# Altium PCB board.PcbDoc (part 2 of 3)
Units mil, origin at the board's own origin, x right, y up, seen from the top; angles counter-clockwise.
Board outline 6000 x 4000 mil, 2 copper layers (Top Layer, Bottom Layer); 112 components, 157 nets, 575 pads, 180 vias.
Unrouted connection lines stored in the file: 1.
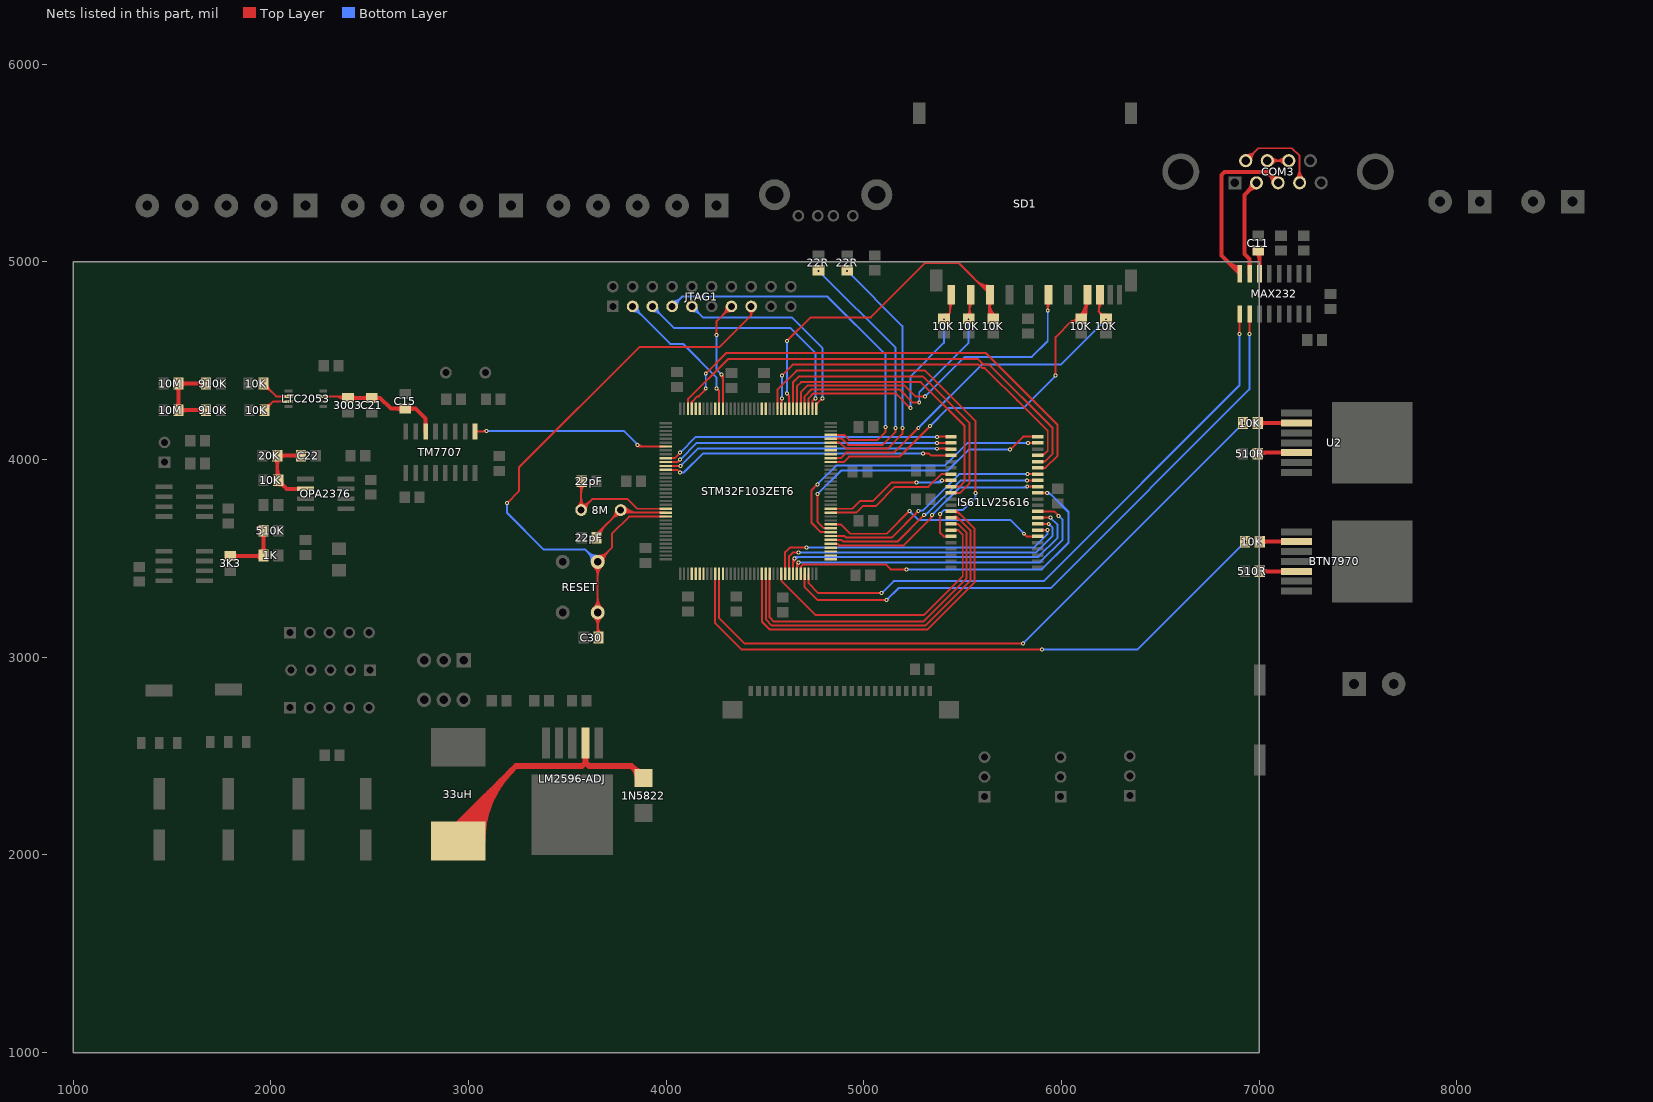
[diagram p2: the nets of this part, all layers, seen from the top]

## Via types
v1: diameter 20, hole 10, Top Layer to Bottom Layer, 173 vias
v2: diameter 196.85, hole 118.11, Top Layer to Bottom Layer, 7 vias

## Nets (pads, with @x,y where several pads share a name; then routed paths per layer and width w, separated by ;. In a path a pad name is that pad's centre, name@x,y a point inside that pad or via, vN(x,y) a via of type N, cw(c..) or ccw(c..) an arc to the next point about the centre after c; other vN are vias at no path point) (continued)
NetC11_2: C11.2 MAX232.6 | length 176.8
  Top Layer w20: C11.2@6987.91,5046.57 cw(c6958.73,5017.39) 7000,5017.39 ; 7000,5022.53 cw(c7034.01,5022.53) C11.2@7009.96,5046.57 ; C11.2@7000,5057.6 7000,4941.36 MAX232.6@7001,4940.36
NetC22_2: 10K.1@2037.4,3895 20K.2 C22.2 OPA2376.2 | length 697.9
  Top Layer w20: 20K.2@2021.38,4005.04 cw(c1994.76,3978.42) 2032.4,3978.42 cw(c2070.04,3978.42) 20K.2@2043.43,4005.04 ; 10K.1@2026.38,3909.96 ccw(c2011.83,3924.5) 10K.1@2032.4,3924.5 ; 2032.4,3948.65 ccw(c2087.11,3948.65) 10K.1@2048.43,3909.96 ; 10K.1@2037.4,3875.47 cw(c2037.4,3828.33) 2070.74,3861.66 ; 20K.2@2043.43,4008.98 cw(c2070.04,3982.36) 2070.04,4020 cw(c2070.04,4057.64) 20K.2@2043.43,4031.02 ; 10K.1@2052.99,3891.06 ccw(c2081.13,3891.06) 10K.1@2061.23,3871.17 ; C22.2@2141.57,4008.98 ccw(c2114.96,3982.36) 2114.96,4020 ccw(c2114.96,4057.64) C22.2@2141.57,4031.02 ; C22.2@2152.6,4020 20K.2@2032.4,4020 2032.4,3900 10K.1@2037.4,3895 2080.4,3852 OPA2376.2@2174.64,3852
NetD1_2: 1N5822.2 33uH.1 LM2596-ADJ.2 | length 2939.4
  Top Layer w30: 33uH.1@2920.3,2070 cw(c3065.86,2070) 2962.93,2172.93 ; 33uH.1@2947.5,2070 2947.5,2157.5 3240,2450 3573.86,2450 3591.93,2468.07 ; 33uH.1@2950.3,2070 cw(c3168.29,2070) 3014.14,2224.14 ; 33uH.1@2980.3,2070 cw(c3270.71,2070) 3065.36,2275.36 ; 33uH.1@3010.3,2070 cw(c3373.14,2070) 3116.57,2326.57 ; 33uH.1@3040.3,2070 cw(c3475.57,2070) 3167.78,2377.78 ; 33uH.1@3070.3,2070 cw(c3577.99,2070) 3219,2429 ; LM2596-ADJ.2@3591.93,2566.85 3591.93,2468.07 ; 1N5822.2@3854.72,2388.58 ccw(c3781.63,2388.58) 3833.32,2440.27 ccw(c3885,2491.95) 1N5822.2@3885,2418.86 ; 1N5822.2@3885,2388.58 3823.58,2450 3610,2450 3591.93,2468.07
NetJ1_2: COM3.2 MAX232.7 | length 584
  Top Layer w20: MAX232.7@6951,4940.36 6951,5014 6925,5040 6925,5339.13 COM3.2@6985.94,5400.08 ; COM3.2@6962.68,5400.08 cw(c6906.5,5400.08) 6946.22,5360.36 cw(c6985.94,5320.64) COM3.2@6985.94,5376.81
NetJ1_3: COM3.3 MAX232.8 | length 1027.9
  Top Layer w20: 6844.14,4997.22 ccw(c6901,5054.08) MAX232.8@6901,4973.67 ; 6878.28,4963.08 ccw(c6901,4985.79) MAX232.8@6901,4953.67 ; MAX232.8@6901,4940.36 6810,5031.36 6810,5440 6825,5455 7040.08,5455 COM3.3@7095,5400.08 ; COM3.3@7071.73,5400.08 ccw(c7015.56,5400.08) 7055.28,5439.8 ccw(c7095,5479.52) COM3.3@7095,5423.35
NetJ1_4: COM3.4 COM3.6 | length 803.8
  Top Layer w10: COM3.6@6931.42,5511.89 6994.53,5575 7165,5575 7204.05,5535.95 COM3.4@7204.05,5400.08 ; COM3.6@6931.42,5530.16 ccw(c6931.42,5574.26) 6962.6,5543.07 ccw(c6993.79,5511.89) COM3.6@6949.69,5511.89 ; COM3.6@6931.42,5540.16 ccw(c6931.42,5608.4) 6979.67,5560.15 ccw(c7027.93,5511.89) COM3.6@6959.69,5511.89 ; COM3.4@7184.07,5420.07 ccw(c7135.81,5468.32) 7204.05,5468.32 ccw(c7272.3,5468.32) COM3.4@7224.04,5420.07 ; COM3.4@7191.14,5413 ccw(c7159.95,5444.18) 7204.05,5444.18 ccw(c7248.16,5444.18) COM3.4@7216.97,5413
NetJ1_7: COM3.7 COM3.8 | length 462
  Top Layer w10: COM3.7@7040.47,5511.89 COM3.8@7149.53,5511.89 ; COM3.7@7053.39,5498.97 cw(c7084.57,5467.79) 7084.57,5511.89 cw(c7084.57,5555.99) COM3.7@7053.39,5524.81 ; COM3.7@7060.46,5491.9 cw(c7108.72,5443.65) 7108.72,5511.89 cw(c7108.72,5580.13) COM3.7@7060.46,5531.88 ; COM3.8@7129.54,5491.9 ccw(c7081.28,5443.65) 7081.28,5511.89 ccw(c7081.28,5580.13) COM3.8@7129.54,5531.88 ; COM3.8@7136.61,5498.97 ccw(c7105.43,5467.79) 7105.43,5511.89 ccw(c7105.43,5555.99) COM3.8@7136.61,5524.81
NetQ2_2: 10K.2@1962.4,4385 LTC2053.2 | length 259
  Top Layer w10: 10K.2@1962.4,4360.47 cw(c1962.4,4301.26) 2004.27,4343.13 ; 10K.2@1962.4,4370.47 cw(c1962.4,4335.4) 10K.2@1987.2,4360.2 ; 10K.2@1962.4,4385 2027,4320.4 LTC2053.2@2089,4320.4 ; 10K.2@1982.99,4381.06 ccw(c2023.2,4381.06) 1994.77,4352.63
NetQ2_3: 10K.2@1967.4,4250 LTC2053.3 | length 245.8
  Top Layer w10: 10K.2@1967.4,4250 2012.2,4294.8 LTC2053.3@2089,4294.8 ; 10K.2@1967.4,4264.53 ccw(c1967.4,4299.6) 10K.2@1992.2,4274.8 ; 10K.2@1967.4,4274.53 ccw(c1967.4,4333.74) 2009.27,4291.87 ; 10K.2@1987.99,4253.94 cw(c2028.2,4253.94) 1999.77,4282.37
NetR3_2: 10K.2@7002.4,3585 BTN7970.2 | length 274.4
  Top Layer w20: 10K.2@7002.4,3585 BTN7970.2@7188.46,3585 ; 10K.2@7013.43,3573.98 cw(c7040.04,3547.36) 7040.04,3585 cw(c7040.04,3622.64) 10K.2@7013.43,3596.02 ; BTN7970.2@7121.98,3579.54 ccw(c7108.81,3566.37) 7108.81,3585 ccw(c7108.81,3603.63) BTN7970.2@7121.98,3590.46
NetR4_2: 10K.2@6992.4,4185 U2.2 | length 284.4
  Top Layer w20: 10K.2@6992.4,4185 U2.2@7188.46,4185 ; 10K.2@7003.43,4173.98 cw(c7030.04,4147.36) 7030.04,4185 cw(c7030.04,4222.64) 10K.2@7003.43,4196.02 ; U2.2@7121.98,4179.54 ccw(c7108.81,4166.37) 7108.81,4185 ccw(c7108.81,4203.63) U2.2@7121.98,4190.46
NetR5_2: 510R.2@7002.4,3435 BTN7970.5 | length 274.4
  Top Layer w20: 510R.2@7002.4,3435 BTN7970.5@7188.46,3435 ; 510R.2@7013.43,3423.98 cw(c7040.04,3397.36) 7040.04,3435 cw(c7040.04,3472.64) 510R.2@7013.43,3446.02 ; BTN7970.5@7121.98,3429.54 ccw(c7108.81,3416.37) 7108.81,3435 ccw(c7108.81,3453.63) BTN7970.5@7121.98,3440.46
NetR6_2: 510R.2@6992.4,4030 U2.5 | length 279.4
  Top Layer w20: 510R.2@6997.4,4035 U2.5@7188.46,4035 ; 510R.2@7003.43,4022.91 cw(c7032.61,3993.73) 7032.61,4035 ; 510R.2@7003.43,4044.96 ccw(c7027.47,4069.01) 7027.47,4035 ; U2.5@7121.98,4029.54 ccw(c7108.81,4016.37) 7108.81,4035 ccw(c7108.81,4053.63) U2.5@7121.98,4040.46
NetR13_1: 10M.1@1532.4,4385 10M.2@1532.4,4250 910K.2 | length 770.1
  Top Layer w20: 10M.2@1521.38,4264.96 ccw(c1494.76,4291.58) 1532.4,4291.58 ccw(c1570.04,4291.58) 10M.2@1543.43,4264.96 ; 10M.1@1521.38,4370.04 cw(c1494.76,4343.42) 1532.4,4343.42 cw(c1570.04,4343.42) 10M.1@1543.43,4370.04 ; 10M.2@1543.43,4238.98 cw(c1570.04,4212.36) 1570.04,4250 cw(c1570.04,4287.64) 10M.2@1543.43,4261.02 ; 10M.1@1543.43,4373.98 cw(c1570.04,4347.36) 1570.04,4385 cw(c1570.04,4422.64) 10M.1@1543.43,4396.02 ; 910K.2@1661.57,4238.98 ccw(c1634.96,4212.36) 1634.96,4250 ccw(c1634.96,4287.64) 910K.2@1661.57,4261.02 ; 910K.2@1661.57,4373.98 ccw(c1634.96,4347.36) 1634.96,4385 ccw(c1634.96,4422.64) 910K.2@1661.57,4396.02 ; 910K.2@1672.6,4250 10M.2@1532.4,4250 10M.1@1532.4,4385 910K.2@1672.6,4385
NetR24_2: 1K.2@1962.6,3515 3K3.2 510K.1@1962.6,3640 | length 530.2
  Top Layer w20: 3K3.2@1795,3512.4 1960,3512.4 1K.2@1962.6,3515 510K.1@1962.6,3640 ; 3K3.2@1809.96,3501.38 cw(c1836.58,3474.76) 1836.58,3512.4 cw(c1836.58,3550.04) 3K3.2@1809.96,3523.43 ; 1921.73,3512.4 cw(c1921.73,3470.19) 1K.2@1951.57,3500.04 ; 1928.19,3512.4 ccw(c1928.19,3545.47) 1K.2@1951.57,3522.09 ; 1K.2@1951.57,3529.96 ccw(c1924.96,3556.58) 1962.6,3556.58 ccw(c2000.24,3556.58) 1K.2@1973.62,3529.96 ; 510K.1@1951.57,3625.04 cw(c1924.96,3598.42) 1962.6,3598.42 cw(c2000.24,3598.42) 510K.1@1973.62,3625.04
NRST: C30.2 JTAG1.8 RESET.2 STM32F103ZET6.25 | length 4365.6
  Top Layer w10: v1(3195,3780) 3255,3840 3255,3960 3865,4570 4270,4570 4430,4730 ; v1@3195,3785 ccw(c3195,3797.07) 3203.54,3788.54 ccw(c3212.07,3780) v1@3200,3780 ; RESET.2@3632.06,3205.53 cw(c3580.11,3153.58) 3653.58,3153.58 cw(c3727.05,3153.58) RESET.2@3675.1,3205.53 ; RESET.2@3632.06,3248.57 ccw(c3580.11,3300.52) 3653.58,3300.52 ccw(c3727.05,3300.52) RESET.2@3675.1,3248.57 ; RESET.2@3632.06,3461.43 cw(c3580.11,3409.48) 3653.58,3409.48 cw(c3727.05,3409.48) RESET.2@3675.1,3461.43 ; RESET.2@3639.13,3212.6 cw(c3604.25,3177.72) 3653.58,3177.72 cw(c3702.91,3177.72) RESET.2@3668.03,3212.6 ; RESET.2@3639.13,3241.5 ccw(c3604.25,3276.38) 3653.58,3276.38 ccw(c3702.91,3276.38) RESET.2@3668.03,3241.5 ; RESET.2@3639.13,3468.5 cw(c3604.25,3433.62) 3653.58,3433.62 cw(c3702.91,3433.62) RESET.2@3668.03,3468.5 ; C30.2@3642.84,3118.5 ccw(c3616.91,3144.42) 3653.58,3144.42 ; C30.2@3653.58,3121.18 RESET.2@3653.58,3482.95 3725,3554.37 3725,3625 3812.05,3712.05 STM32F103ZET6.25@3997.68,3712.05 ; 3653.58,3138.73 ccw(c3692.19,3138.73) C30.2@3664.89,3111.43 ; 3653.58,3162.87 ccw(c3716.33,3162.87) C30.2@3671.96,3118.5 ; RESET.2@3653.58,3503.38 ccw(c3653.58,3552.71) 3688.46,3517.83 ccw(c3723.34,3482.95) RESET.2@3674.01,3482.95 ; RESET.2@3653.58,3513.39 ccw(c3653.58,3586.86) 3705.53,3534.9 ccw(c3757.49,3482.95) RESET.2@3684.02,3482.95 ; JTAG1.8@4416.71,4754.39 cw(c4400.99,4730) 4430,4730 ; JTAG1.8@4430,4775 4430,4730 ; JTAG1.8@4443.29,4754.39 ccw(c4459.01,4730) 4430,4730
  Bottom Layer w10: v1@3191.46,3776.46 cw(c3182.93,3767.93) 3195,3767.93 cw(c3207.07,3767.93) v1@3198.54,3776.46 ; v1(3195,3780) 3195,3730 3380,3545 3591.53,3545 RESET.2@3653.58,3482.95 ; RESET.2@3623.15,3482.95 ccw(c3549.68,3482.95) 3601.63,3534.9 ccw(c3653.58,3586.86) RESET.2@3653.58,3513.39 ; RESET.2@3633.15,3482.95 ccw(c3583.82,3482.95) 3618.7,3517.83 ccw(c3653.58,3552.71) RESET.2@3653.58,3503.38
OSC_1: 8M.2 22pF.2@3572.6,3890 STM32F103ZET6.23 | length 1021.5
  Top Layer w10: 8M.2@3552.32,3762.68 ccw(c3509.64,3805.36) 3570,3805.36 ccw(c3630.36,3805.36) 8M.2@3587.68,3762.68 ; 22pF.2@3558.04,3871.5 cw(c3529.16,3842.63) 3570,3842.63 ; 8M.2@3559.39,3755.61 ccw(c3533.79,3781.21) 3570,3781.21 ccw(c3606.21,3781.21) 8M.2@3580.61,3755.61 ; 8M.2@3570,3760 ccw(c3570,3796.21) 3595.61,3770.61 ccw(c3621.21,3745) 8M.2@3585,3745 ; 8M.2@3570,3770 ccw(c3570,3830.36) 3612.68,3787.68 ccw(c3655.36,3745) 8M.2@3595,3745 ; 3570,3830.08 cw(c3628.58,3830.08) 22pF.2@3587.16,3871.5 ; 3570,3854.22 cw(c3604.44,3854.22) 22pF.2@3580.09,3878.57 ; 22pF.2@3570,3887.4 8M.2@3570,3745 3625,3800 3805,3800 3853.58,3751.42 STM32F103ZET6.23@3997.68,3751.42
OSC_2: 8M.1 22pF.2@3647.4,3605 STM32F103ZET6.24 | length 912.5
  Top Layer w10: 22pF.2@3647.4,3622.4 8M.1@3770,3745 3783.27,3731.73 STM32F103ZET6.24@3997.68,3731.73 ; 22pF.2@3647.4,3629.53 ccw(c3647.4,3646.73) 3659.57,3634.57 ; 22pF.2@3647.99,3608.94 cw(c3681.93,3608.94) 22pF.2@3657.93,3632.93 ; 22pF.2@3657.99,3608.94 cw(c3716.07,3608.94) 3675,3650 ; 22pF.2@3667.99,3608.94 cw(c3750.21,3608.94) 3692.07,3667.07 ; 8M.1@3745,3745 cw(c3684.64,3745) 3727.32,3702.32 cw(c3770,3659.64) 8M.1@3770,3720 ; 8M.1@3755,3745 cw(c3718.79,3745) 3744.39,3719.39 cw(c3770,3693.79) 8M.1@3770,3730 ; 8M.1@3773.54,3748.54 ccw(c3814.1,3789.1) 3814.1,3731.73 ; 8M.1@3780.61,3755.61 ccw(c3838.24,3813.24) 3838.24,3731.73 ; 8M.1@3787.68,3727.32 cw(c3798.32,3716.68) 3798.32,3731.73 ; 8M.1@3787.68,3762.68 ccw(c3862.39,3837.39) 3862.39,3731.73
OUT1: 3003.2 C15.1 C21.1 LTC2053.7 TM7707.6 | length 1043.9
  Top Layer w10: LTC2053.7@2265,4320.4 2382,4320.4 3003.2@2390,4312.4 ; 2317.04,4320.4 cw(c2317.04,4243.38) 3003.2@2371.5,4297.84 ; 2341.19,4320.4 cw(c2341.19,4267.53) 3003.2@2378.57,4304.91 ; 2355.66,4320.4 ccw(c2355.66,4342.8) 3003.2@2371.5,4326.96
  Top Layer w20: 3003.2@2390,4312.4 C21.1@2510,4312.4 2552.6,4312.4 2607.4,4257.6 C15.1@2680,4257.6 2732.4,4257.6 2783,4207 TM7707.6@2783,4143.32 ; 3003.2@2404.96,4301.38 cw(c2431.58,4274.76) 2431.58,4312.4 cw(c2431.58,4350.04) 3003.2@2404.96,4323.43 ; C21.1@2495.04,4301.38 ccw(c2468.42,4274.76) 2468.42,4312.4 ccw(c2468.42,4350.04) C21.1@2495.04,4323.43 ; C21.1@2524.96,4301.38 cw(c2551.58,4274.76) 2551.58,4312.4 cw(c2551.58,4350.04) C21.1@2524.96,4323.43 ; C15.1@2665.04,4246.57 ccw(c2638.42,4219.96) 2638.42,4257.6 ccw(c2638.42,4295.24) C15.1@2665.04,4268.62 ; C15.1@2694.96,4246.57 cw(c2721.58,4219.96) 2721.58,4257.6 cw(c2721.58,4295.24) C15.1@2694.96,4268.62
PA4: STM32F103ZET6.40
PA5: STM32F103ZET6.41
PA6: STM32F103ZET6.42
PA7: STM32F103ZET6.43
PA8: STM32F103ZET6.100
PA9: STM32F103ZET6.101
PA10: STM32F103ZET6.102
PA11: 22R.1@4915,4957.6 STM32F103ZET6.103 | length 1434.5
  Top Layer w10: STM32F103ZET6.103@4832.32,4086.06 4878.94,4086.06 4910,4055 5120,4055 5195,4130 v1(5195,4160) ; v1@5191.46,4156.46 cw(c5182.93,4147.93) 5195,4147.93 cw(c5207.07,4147.93) v1@5198.54,4156.46
  Bottom Layer w10: v1@4915,4950 cw(c4915,4937.93) 4923.54,4946.46 cw(c4932.07,4955) v1@4920,4955 ; v1(4915,4955) 5195,4675 5195,4550 ; v1@5191.46,4163.54 ccw(c5182.93,4172.07) 5195,4172.07 ccw(c5207.07,4172.07) v1@5198.54,4163.54 ; v1(5195,4160) 5195,4550 ; 5195,4580 5195,4550
PA12: 22R.1@4770,4957.6 STM32F103ZET6.104 | length 1425.8
  Top Layer w10: STM32F103ZET6.104@4832.32,4105.75 4889.25,4105.75 4920,4075 5095,4075 5160,4140 v1(5160,4160) ; v1@5156.46,4156.46 cw(c5147.93,4147.93) 5160,4147.93 cw(c5172.07,4147.93) v1@5163.54,4156.46
  Bottom Layer w10: v1@4770,4950 cw(c4770,4937.93) 4778.54,4946.46 cw(c4787.07,4955) v1@4775,4955 ; v1(4770,4955) 5160,4565 5160,4445 ; v1@5156.46,4163.54 ccw(c5147.93,4172.07) 5160,4172.07 ccw(c5172.07,4172.07) v1@5163.54,4163.54 ; v1(5160,4160) 5160,4445 ; 5160,4470 5160,4445
PA13: JTAG1.4 STM32F103ZET6.105 | length 2113.7
  Top Layer w10: STM32F103ZET6.105@4832.32,4125.43 4899.57,4125.43 4925,4100 5070,4100 5110,4140 v1(5110,4165) ; v1@5106.46,4161.46 cw(c5097.93,4152.93) 5110,4152.93 cw(c5122.07,4152.93) v1@5113.54,4161.46
  Bottom Layer w10: JTAG1.4@4030,4775 4080,4825 4815,4825 5110,4530 5110,4365 ; JTAG1.4@4030,4789.53 ccw(c4030,4824.6) 4054.8,4799.8 ccw(c4079.6,4775) JTAG1.4@4044.53,4775 ; JTAG1.4@4030,4799.53 ccw(c4030,4858.74) 4071.87,4816.87 ccw(c4113.74,4775) JTAG1.4@4054.53,4775 ; v1@5106.46,4168.54 ccw(c5097.93,4177.07) 5110,4177.07 ccw(c5122.07,4177.07) v1@5113.54,4168.54 ; v1(5110,4165) 5110,4365 ; 5110,4375 5110,4365
PA14: JTAG1.5 STM32F103ZET6.109 | length 1261.5
  Top Layer w10: STM32F103ZET6.109@4759.49,4257.32 4759.49,4279.49 v1(4790,4310) ; STM32F103ZET6.109@4759.49,4283.82 ccw(c4759.49,4294.27) 4766.88,4286.88 ; v1@4785,4310 cw(c4772.93,4310) 4781.46,4301.46 cw(c4790,4292.93) v1@4790,4305
  Bottom Layer w10: JTAG1.5@4130,4750.47 cw(c4130,4691.26) 4171.87,4733.13 cw(c4213.74,4775) JTAG1.5@4154.53,4775 ; JTAG1.5@4130,4760.47 cw(c4130,4725.4) 4154.8,4750.2 cw(c4179.6,4775) JTAG1.5@4144.53,4775 ; JTAG1.5@4130,4775 4185,4720 4635,4720 4790,4565 v1(4790,4310) ; v1@4786.46,4313.54 ccw(c4777.93,4322.07) 4790,4322.07 ccw(c4802.07,4322.07) v1@4793.54,4313.54
PA15: JTAG1.3 STM32F103ZET6.110 | length 1397.3
  Top Layer w10: STM32F103ZET6.110@4739.8,4257.32 4739.8,4294.8 v1(4755,4310) ; v1@4750,4310 cw(c4737.93,4310) 4746.46,4301.46 cw(c4755,4292.93) v1@4755,4305
  Bottom Layer w10: JTAG1.3@3930,4750.47 cw(c3930,4691.26) 3971.87,4733.13 cw(c4013.74,4775) JTAG1.3@3954.53,4775 ; JTAG1.3@3930,4760.47 cw(c3930,4725.4) 3954.8,4750.2 cw(c3979.6,4775) JTAG1.3@3944.53,4775 ; JTAG1.3@3930,4775 4040,4665 4630,4665 4755,4540 v1(4755,4310) ; v1@4751.46,4313.54 ccw(c4742.93,4322.07) 4755,4322.07 ccw(c4767.07,4322.07) v1@4758.54,4313.54
PB0: 10K.1@6927.6,3585 STM32F103ZET6.46 | length 3270.1
  Top Layer w10: STM32F103ZET6.46@4247.68,3422.68 4247.68,3172.32 4380,3040 v1(5900,3040) ; v1@5896.46,3036.46 ccw(c5887.93,3027.93) 5887.93,3040 ccw(c5887.93,3052.07) v1@5896.46,3043.54
  Bottom Layer w10: v1(5900,3040) 6385,3040 v1(6930,3585) ; v1@5903.54,3036.46 cw(c5912.07,3027.93) 5912.07,3040 cw(c5912.07,3052.07) v1@5903.54,3043.54 ; v1@6925,3585 cw(c6912.93,3585) 6921.46,3576.46 cw(c6930,3567.93) v1@6930,3580
PB1: 10K.1@6917.6,4185 STM32F103ZET6.47 | length 3446.9
  Top Layer w10: STM32F103ZET6.47@4267.36,3422.68 4267.36,3197.64 4395,3070 v1@5802.6,3070 ; v1@5801.46,3066.46 ccw(c5792.93,3057.93) 5792.93,3070 ccw(c5792.93,3082.07) v1@5801.46,3073.54
  Bottom Layer w10: v1(5805,3070) v1(6920,4185) ; v1@5805,3075 ccw(c5805,3087.07) 5813.54,3078.54 ccw(c5822.07,3070) v1@5810,3070 ; v1@6915,4185 cw(c6902.93,4185) 6911.46,4176.46 cw(c6920,4167.93) v1@6920,4180
PB2: STM32F103ZET6.48
PB3: JTAG1.7 STM32F103ZET6.133 | length 830.7
  Top Layer w10: v1@4251.46,4633.54 ccw(c4242.93,4642.07) 4255,4642.07 ccw(c4267.07,4642.07) v1@4258.54,4633.54 ; v1(4255,4630) 4255,4700 JTAG1.7@4330,4775 4305,4750 ; v1@4276.46,4426.46 cw(c4250.91,4400.91) 4287.05,4400.91 ; v1(4280,4430) 4287.05,4422.95 STM32F103ZET6.133@4287.05,4257.32 ; JTAG1.7@4305.47,4775 cw(c4246.26,4775) 4288.13,4733.13 cw(c4330,4691.26) JTAG1.7@4330,4750.47 ; JTAG1.7@4315.47,4775 cw(c4280.4,4775) 4305.2,4750.2 cw(c4330,4725.4) JTAG1.7@4330,4760.47
  Bottom Layer w10: v1@4251.46,4626.46 cw(c4242.93,4617.93) 4255,4617.93 cw(c4267.07,4617.93) v1@4258.54,4626.46 ; v1(4255,4630) 4255,4455 v1(4280,4430) ; v1@4275,4430 ccw(c4262.93,4430) 4271.46,4438.54 ccw(c4280,4447.07) v1@4280,4435
PB4: JTAG1.2 STM32F103ZET6.134 | length 922.9
  Top Layer w10: v1@4255,4355 cw(c4255,4342.93) 4263.54,4351.46 cw(c4272.07,4360) v1@4260,4360 ; v1(4255,4360) 4267.36,4347.64 STM32F103ZET6.134@4267.36,4257.32
  Bottom Layer w10: JTAG1.2@3830,4750.47 cw(c3830,4691.26) 3871.87,4733.13 cw(c3913.74,4775) JTAG1.2@3854.53,4775 ; JTAG1.2@3830,4760.47 cw(c3830,4725.4) 3854.8,4750.2 cw(c3879.6,4775) JTAG1.2@3844.53,4775 ; JTAG1.2@3830,4775 4020,4585 4085,4585 4255,4415 v1(4255,4360) ; v1@4251.46,4363.54 ccw(c4242.93,4372.07) 4255,4372.07 ccw(c4267.07,4372.07) v1@4258.54,4363.54
PB5: STM32F103ZET6.135
PB8: STM32F103ZET6.139
PB9: STM32F103ZET6.140
PB10: MAX232.10 STM32F103ZET6.69 | length 3266.5
  Top Layer w10: STM32F103ZET6.69@4700.43,3422.68 4700.43,3354.57 4765,3290 v1(5115,3290) ; v1@5111.46,3286.46 ccw(c5102.93,3277.93) 5102.93,3290 ccw(c5102.93,3302.07) v1@5111.46,3293.54 ; MAX232.10@6946.18,4699.33 cw(c6934.56,4687.7) 6951,4687.7 cw(c6967.44,4687.7) MAX232.10@6955.82,4699.33 ; v1@6946.46,4638.54 ccw(c6935.51,4649.49) 6951,4649.49 ; v1@6950,4630 6951,4631 MAX232.10@6951,4735.64
  Bottom Layer w10: v1(5115,3290) 5175,3350 5945,3350 6950,4355 v1(6950,4635) ; v1@5115,3295 ccw(c5115,3307.07) 5123.54,3298.54 ccw(c5132.07,3290) v1@5120,3290 ; v1@6946.46,4631.46 cw(c6937.93,4622.93) 6950,4622.93 cw(c6962.07,4622.93) v1@6953.54,4631.46
PB11: MAX232.9 STM32F103ZET6.70 | length 3144.2
  Top Layer w10: STM32F103ZET6.70@4720.12,3422.68 4720.12,3374.88 4770,3325 v1(5090,3325) ; v1@5086.46,3321.46 ccw(c5077.93,3312.93) 5077.93,3325 ccw(c5077.93,3337.07) v1@5086.46,3328.54 ; MAX232.9@6896.18,4699.33 cw(c6884.56,4687.7) 6901,4687.7 cw(c6917.44,4687.7) MAX232.9@6905.82,4699.33 ; v1@6896.46,4638.54 ccw(c6885.51,4649.49) 6901,4649.49 ; v1@6900,4630 6901,4631 MAX232.9@6901,4735.64
  Bottom Layer w10: v1(5090,3325) 5150,3385 5910,3385 6900,4375 v1(6900,4635) ; v1@5090,3330 ccw(c5090,3342.07) 5098.54,3333.54 ccw(c5107.07,3325) v1@5095,3325 ; v1@6896.46,4631.46 cw(c6887.93,4622.93) 6900,4622.93 cw(c6912.07,4622.93) v1@6903.54,4631.46
PB12: STM32F103ZET6.73
PB13: STM32F103ZET6.74
PB14: STM32F103ZET6.75
PB15: STM32F103ZET6.76
PC8: 10K.1@6100,4712.4 SD1.7 STM32F103ZET6.98 | length 2302.2
  Top Layer w10: STM32F103ZET6.98@4832.32,3987.64 4897.64,3987.64 4925,4015 5180,4015 v1(5335,4170) ; v1@5330,4170 cw(c5317.93,4170) 5326.46,4161.46 cw(c5335,4152.93) v1@5335,4165 ; v1@5966.46,4428.54 ccw(c5957.93,4437.07) 5970,4437.07 ccw(c5982.07,4437.07) v1@5973.54,4428.54 ; v1(5970,4425) 5970,4620 6050,4700 ; 6063.96,4700 ccw(c6063.96,4723.31) 10K.1@6086.04,4715.81 ; 10K.1@6076.57,4719.03 cw(c6050,4728.06) 6050,4700 ; 10K.1@6089.38,4726.96 ccw(c6002.04,4814.3) SD1.7@6125.55,4814.3 ; 10K.1@6096.45,4719.89 ccw(c6026.19,4790.15) SD1.7@6125.55,4790.15 ; 10K.1@6103.52,4712.82 ccw(c6050.33,4766.01) 6125.55,4766.01 ; 10K.1@6110.59,4705.75 ccw(c6074.47,4741.87) 6125.55,4741.87 ; SD1.7@6120.17,4795.09 cw(c6107.17,4782.09) 6125.55,4782.09 cw(c6153.93,4782.09) SD1.7@6133.86,4802.16 ; 6125.55,4757.95 cw(c6178.07,4757.95) SD1.7@6140.94,4795.09 ; SD1.7@6125.55,4830 6125.55,4737.95 6087.6,4700 6050,4700
  Bottom Layer w10: v1(5335,4170) 5425,4260 5805,4260 v1(5970,4425) ; v1@5335,4175 ccw(c5335,4187.07) 5343.54,4178.54 ccw(c5352.07,4170) v1@5340,4170 ; v1@5965,4425 cw(c5952.93,4425) 5961.46,4416.46 cw(c5970,4407.93) v1@5970,4420
PC9: 10K.1@6225,4712.4 SD1.8 STM32F103ZET6.99 | length 2059.1
  Top Layer w10: STM32F103ZET6.99@4832.32,4007.32 4882.32,4007.32 4910,4035 5150,4035 v1(5275,4160) ; v1@5270,4160 cw(c5257.93,4160) 5266.46,4151.46 cw(c5275,4142.93) v1@5275,4155 ; SD1.8@6184.14,4795.09 cw(c6171.15,4782.09) 6189.53,4782.09 cw(c6217.91,4782.09) SD1.8@6197.84,4802.16 ; 6187.56,4749.84 cw(c6155.8,4718.08) 10K.1@6200.55,4714.19 ; 6189.53,4757.95 cw(c6242.05,4757.95) SD1.8@6204.91,4795.09 ; SD1.8@6189.53,4830 6189.53,4747.87 10K.1@6225,4712.4 ; 6192.63,4744.77 ccw(c6221.06,4773.2) 10K.1@6221.06,4732.99 ; 10K.1@6202.74,4734.67 cw(c6183.72,4715.65) 10K.1@6210.51,4713.32 ; 10K.1@6214.77,4722.64 cw(c6202.13,4710) 10K.1@6220,4710
  Bottom Layer w10: v1(5275,4160) 5595,4480 5995,4480 v1(6225,4710) ; v1@5275,4165 ccw(c5275,4177.07) 5283.54,4168.54 ccw(c5292.07,4160) v1@5280,4160 ; v1@6220,4710 cw(c6207.93,4710) 6216.46,4701.46 cw(c6225,4692.93) v1@6225,4705
PC10: 10K.1@5405,4712.4 SD1.9 STM32F103ZET6.111 | length 1468.3
  Top Layer w10: STM32F103ZET6.111@4720.12,4257.32 4720.12,4310.12 4745,4335 5160,4335 v1(5235,4260) ; v1@5230,4260 ccw(c5217.93,4260) 5226.46,4268.54 ccw(c5235,4277.07) v1@5235,4265 ; 10K.1@5405,4712.4 5436.57,4743.98 SD1.9@5436.57,4830 ; 10K.1@5409.33,4732.99 ccw(c5410.03,4770.51) 5436.57,4743.97 ccw(c5456.79,4723.76) 10K.1@5428.97,4717.16 ; 10K.1@5410,4710 cw(c5427.87,4710) 10K.1@5415.23,4722.64 ; SD1.9@5431.19,4795.09 cw(c5418.2,4782.09) 5436.57,4782.09 cw(c5464.96,4782.09) SD1.9@5444.89,4802.16 ; 5436.57,4757.95 cw(c5489.1,4757.95) SD1.9@5451.96,4795.09
  Bottom Layer w10: v1@5231.46,4263.54 ccw(c5222.93,4272.07) 5235,4272.07 ccw(c5247.07,4272.07) v1@5238.54,4263.54 ; v1(5235,4260) 5235,4420 5405,4590 v1(5405,4710) ; v1@5401.46,4706.46 cw(c5392.93,4697.93) 5405,4697.93 cw(c5417.07,4697.93) v1@5408.54,4706.46
PC11: 10K.1@5530,4712.4 SD1.1 STM32F103ZET6.112 | length 1585.9
  Top Layer w10: STM32F103ZET6.112@4700.43,4257.32 4700.43,4320.43 4735,4355 5180,4355 5245,4290 v1(5280,4290) ; v1@5276.46,4286.46 ccw(c5267.93,4277.93) 5267.93,4290 ccw(c5267.93,4302.07) v1@5276.46,4293.54 ; 10K.1@5519.38,4726.96 ccw(c5481.66,4764.68) 5535,4764.68 ; 10K.1@5526.46,4713.54 ccw(c5505.86,4734.14) 10K.1@5535,4734.14 ; 10K.1@5526.45,4719.89 ccw(c5505.8,4740.54) 5535,4740.54 ; SD1.1@5529.62,4795.09 cw(c5516.62,4782.09) 5535,4782.09 cw(c5563.38,4782.09) SD1.1@5543.31,4802.16 ; 10K.1@5530,4712.4 5535,4717.4 SD1.1@5535,4830 ; 5535,4757.95 cw(c5587.52,4757.95) SD1.1@5550.38,4795.09 ; 5535,4759.55 ccw(c5581.08,4759.55) 10K.1@5548.5,4726.96
  Bottom Layer w10: v1@5276.46,4293.54 ccw(c5267.93,4302.07) 5280,4302.07 ccw(c5292.07,4302.07) v1@5283.54,4293.54 ; v1(5280,4290) 5280,4340 5530,4590 v1(5530,4710) ; v1@5526.46,4706.46 cw(c5517.93,4697.93) 5530,4697.93 cw(c5542.07,4697.93) v1@5533.54,4706.46
PC12: SD1.5 STM32F103ZET6.113 | length 1862.2
  Top Layer w10: STM32F103ZET6.113@4680.75,4257.32 4680.75,4340.75 4715,4375 5205,4375 5260,4320 v1(5310,4320) ; v1@5306.46,4316.46 ccw(c5297.93,4307.93) 5297.93,4320 ccw(c5297.93,4332.07) v1@5306.46,4323.54 ; SD1.5@5923.32,4795.09 cw(c5910.32,4782.09) 5928.7,4782.09 cw(c5957.08,4782.09) SD1.5@5937.01,4802.16 ; v1@5928.7,4756.3 SD1.5@5928.7,4830 ; v1@5928.7,4757.95 cw(c5981.23,4757.95) SD1.5@5944.08,4795.09 ; 5928.7,4770.21 ccw(c5945.21,4770.21) v1@5933.54,4758.54
  Bottom Layer w10: v1(5310,4320) 5510,4520 5850,4520 5930,4600 v1(5930,4755) ; v1@5310,4325 ccw(c5310,4337.07) 5318.54,4328.54 ccw(c5327.07,4320) v1@5315,4320 ; v1@5926.46,4751.46 cw(c5917.93,4742.93) 5930,4742.93 cw(c5942.07,4742.93) v1@5933.54,4751.46
PC13: STM32F103ZET6.7 TM7707.1 | length 1124.5
  Top Layer w10: TM7707.1@3033,4143.32 v1@3093.32,4143.32 ; TM7707.1@3037.82,4138.5 cw(c3049.44,4126.87) 3049.44,4143.32 cw(c3049.44,4159.76) TM7707.1@3037.82,4148.13 ; 3073.86,4143.32 ccw(c3073.86,4161.14) v1@3086.46,4148.54 ; v1@3851.46,4071.46 ccw(c3863.74,4083.74) 3863.74,4066.38 ; v1(3855,4075) 3863.62,4066.38 STM32F103ZET6.7@3997.68,4066.38 ; v1@3858.54,4078.54 ccw(c3887.89,4107.89) 3887.89,4066.38
  Bottom Layer w10: v1(3090,4145) 3785,4145 v1(3855,4075) ; v1@3093.54,4141.46 cw(c3102.07,4132.93) 3102.07,4145 cw(c3102.07,4157.07) v1@3093.54,4148.54 ; v1@3850,4075 ccw(c3837.93,4075) 3846.46,4083.54 ccw(c3855,4092.07) v1@3855,4080
PD0: IS61LV25616.9 STM32F103ZET6.114 | length 1438.3
  Top Layer w10: STM32F103ZET6.114@4661.06,4257.32 4661.06,4371.06 4682,4392 5288,4392 5510,4170 5510,3890 5483.74,3863.74 IS61LV25616.9@5440.51,3863.74 ; IS61LV25616.9@5462.93,3861.01 cw(c5469.51,3854.43) 5469.51,3863.74 cw(c5469.51,3873.05) IS61LV25616.9@5462.93,3866.47
PD1: IS61LV25616.10 STM32F103ZET6.115 | length 1570.8
  Top Layer w10: STM32F103ZET6.115@4641.38,4257.32 4641.38,4391.38 4670,4420 5300,4420 5535,4185 5535,3880 5487.24,3832.24 IS61LV25616.10@5440.51,3832.24 ; IS61LV25616.10@5462.93,3829.52 cw(c5469.51,3822.93) 5469.51,3832.24 cw(c5469.51,3841.56) IS61LV25616.10@5462.93,3834.97
PD2: 10K.1@5655,4712.4 SD1.2 STM32F103ZET6.116 | length 2386.3
  Top Layer w10: v1@4610,4330 cw(c4610,4317.93) 4618.54,4326.46 cw(c4627.07,4335) v1@4615,4335 ; v1(4610,4335) 4621.69,4323.31 STM32F103ZET6.116@4621.69,4257.32 ; v1(4610,4600) 4730,4720 5035,4720 5310,4995 5478.43,4995 SD1.2@5638.43,4835 ; v1@4610,4605 ccw(c4610,4617.07) 4618.54,4608.54 ccw(c4627.07,4600) v1@4615,4600 ; 5562.95,4910.48 ccw(c5638.43,4985.95) SD1.2@5638.43,4879.21 ; 5580.02,4893.4 ccw(c5638.43,4951.81) SD1.2@5638.43,4869.21 ; 5597.09,4876.33 ccw(c5638.43,4917.67) SD1.2@5638.43,4859.21 ; 5614.16,4859.26 ccw(c5638.43,4883.52) SD1.2@5638.43,4849.21 ; SD1.2@5628.04,4795.09 cw(c5615.04,4782.09) 5633.43,4782.09 cw(c5661.8,4782.09) SD1.2@5641.74,4802.16 ; SD1.2@5628.43,4830 5633.43,4830 5633.43,4733.98 10K.1@5655,4712.4 ; SD1.2@5631.23,4842.19 ccw(c5638.43,4849.38) SD1.2@5638.43,4839.21 ; 10K.1@5633.43,4732.26 ccw(c5670.93,4732.26) 10K.1@5644.41,4705.75 ; 5633.43,4756.41 ccw(c5695.07,4756.41) 10K.1@5651.48,4712.82 ; 5633.43,4757.95 cw(c5685.95,4757.95) SD1.2@5648.81,4795.09 ; 5633.43,4780.55 ccw(c5719.21,4780.55) 10K.1@5658.55,4719.89 ; SD1.2@5633.43,4804.69 ccw(c5743.35,4804.69) 10K.1@5665.62,4726.96
  Bottom Layer w10: v1@4606.46,4596.46 cw(c4597.93,4587.93) 4610,4587.93 cw(c4622.07,4587.93) v1@4613.54,4596.46 ; 4610,4350 v1(4610,4335) v1(4610,4600) ; 4610,4347.07 ccw(c4622.07,4347.07) 4613.54,4338.54 cw(c4622.07,4347.07) 4610,4347.07 ; 4610,4347.07 cw(c4597.93,4347.07) 4606.46,4338.54 ccw(c4597.93,4347.07) 4610,4347.07
PD3: STM32F103ZET6.117
PD4: IS61LV25616.41 STM32F103ZET6.118 | length 2054.2
  Top Layer w10: STM32F103ZET6.118@4582.32,4257.32 4582.32,4307.32 v1(4585,4310) ; 4582.32,4291.46 cw(c4603.54,4291.46) v1@4588.54,4306.46 ; v1(4585,4425) 4640,4480 4720,4480 ; v1@4585,4430 ccw(c4585,4442.07) 4593.54,4433.54 ccw(c4602.07,4425) v1@4590,4425 ; 4705,4480 4720,4480 ; 5775,4300 5800,4275 ; IS61LV25616.41@5879.49,4021.22 5906.22,4021.22 5930,4045 5930,4145 5800,4275 ; IS61LV25616.41@5899.17,4025.08 ccw(c5899.17,4051.41) 5917.79,4032.79 ; 4720,4480 5580.96,4480 5597.96,4463 5612,4463 5800,4275
  Bottom Layer w10: v1@4581.46,4421.46 cw(c4572.93,4412.93) 4585,4412.93 cw(c4597.07,4412.93) v1@4588.54,4421.46 ; 4585,4365 v1(4585,4310) v1(4585,4425) ; 4585,4322.07 ccw(c4597.07,4322.07) 4588.54,4313.54 cw(c4597.07,4322.07) 4585,4322.07 ; 4585,4322.07 cw(c4572.93,4322.07) 4581.46,4313.54 ccw(c4572.93,4322.07) 4585,4322.07
PD5: IS61LV25616.17 STM32F103ZET6.119 | length 2112.5
  Top Layer w10: STM32F103ZET6.119@4562.64,4257.32 4562.64,4352.64 4660,4450 4705,4450 ; 4699.04,4450 4705,4450 ; v1@5381.46,3721.46 cw(c5372.93,3712.93) 5385,3712.93 cw(c5397.07,3712.93) v1@5388.54,3721.46 ; v1(5385,3725) 5385,3630 5403.23,3611.77 IS61LV25616.17@5440.51,3611.77 ; IS61LV25616.17@5418.1,3609.04 ccw(c5411.51,3602.46) 5411.51,3611.77 ccw(c5411.51,3621.09) IS61LV25616.17@5418.1,3614.5 ; v1@5561.46,3833.54 ccw(c5552.93,3842.07) 5565,3842.07 ccw(c5577.07,3842.07) v1@5568.54,3833.54 ; v1(5565,3830) 5565,4195 5310,4450 4705,4450
  Bottom Layer w10: v1(5385,3725) 5405,3745 5500,3745 5525,3770 ; v1@5385,3730 ccw(c5385,3742.07) 5393.54,3733.54 ccw(c5402.07,3725) v1@5390,3725 ; 5535,3780 5525,3770 ; v1@5561.46,3826.46 cw(c5552.93,3817.93) 5565,3817.93 cw(c5577.07,3817.93) v1@5568.54,3826.46 ; v1(5565,3830) 5565,3810 5525,3770
PD6: STM32F103ZET6.122
PD7: STM32F103ZET6.123
PD8: IS61LV25616.36 STM32F103ZET6.77 | length 1308.5
  Top Layer w10: STM32F103ZET6.77@4832.32,3574.25 4867.01,3574.25 4876.26,3565 5200,3565 5345,3710 v1(5345,3720) ; STM32F103ZET6.77@4858.14,3573.37 cw(c4861.63,3559.78) 4871.56,3569.7 ; 5329.39,3694.39 ccw(c5303.79,3720) v1@5340,3720 ; v1(5826.26,3863.74) IS61LV25616.36@5879.49,3863.74 ; v1@5829.8,3860.2 cw(c5838.33,3851.67) 5838.33,3863.74 cw(c5838.33,3875.81) v1@5829.8,3867.28 ; IS61LV25616.36@5857.07,3861.01 ccw(c5850.49,3854.43) 5850.49,3863.74 ccw(c5850.49,3873.05) IS61LV25616.36@5857.07,3866.47
  Bottom Layer w10: v1(5345,3720) 5475.89,3850.89 ; v1@5345,3725 ccw(c5345,3737.07) 5353.54,3728.54 ccw(c5362.07,3720) v1@5350,3720 ; 5805.16,3860 ccw(c5805.16,3884.84) v1@5822.72,3867.28 ; v1(5826.26,3863.74) 5822.52,3860 5485,3860 ; 5475.89,3850.89 5485,3860 ; 5475.89,3850.89 5485,3860
PD9: IS61LV25616.37 STM32F103ZET6.78 | length 1277.2
  Top Layer w10: STM32F103ZET6.78@4832.32,3593.94 4886.06,3593.94 4895,3585 5170,3585 v1(5305,3720) ; v1@5300,3720 cw(c5287.93,3720) 5296.46,3711.46 cw(c5305,3702.93) v1@5305,3715 ; v1(5825.24,3895.24) IS61LV25616.37@5879.49,3895.24 ; v1@5828.77,3891.7 cw(c5837.31,3883.16) 5837.31,3895.24 cw(c5837.31,3907.31) v1@5828.77,3898.77 ; IS61LV25616.37@5857.07,3892.51 ccw(c5850.49,3885.92) 5850.49,3895.24 ccw(c5850.49,3904.55) IS61LV25616.37@5857.07,3897.96
  Bottom Layer w10: v1(5305,3720) 5313.89,3720 5489.12,3895.24 v1(5825.24,3895.24) ; v1@5305,3725 ccw(c5305,3758.53) 5328.71,3734.82 ; v1@5821.7,3891.7 ccw(c5813.16,3883.16) 5813.16,3895.24 ccw(c5813.16,3907.31) v1@5821.7,3898.77
PD10: IS61LV25616.38 STM32F103ZET6.79 | length 1270.4
  Top Layer w10: STM32F103ZET6.79@4832.32,3613.62 4901.38,3613.62 4910,3605 5140,3605 v1(5275,3740) ; v1@5270,3740 cw(c5257.93,3740) 5266.46,3731.46 cw(c5275,3722.93) v1@5275,3735 ; v1(5826.73,3926.73) IS61LV25616.38@5879.49,3926.73 ; v1@5830.27,3923.2 cw(c5838.8,3914.66) 5838.8,3926.73 cw(c5838.8,3938.8) v1@5830.27,3930.27 ; IS61LV25616.38@5857.07,3924 ccw(c5850.49,3917.42) 5850.49,3926.73 ccw(c5850.49,3936.05) IS61LV25616.38@5857.07,3929.46
  Bottom Layer w10: v1(5275,3740) 5277,3742 5297,3742 5481.73,3926.73 v1(5826.73,3926.73) ; v1@5278.54,3736.46 cw(c5291.9,3723.1) 5291.9,3742 ; v1@5823.2,3923.2 ccw(c5814.66,3914.66) 5814.66,3926.73 ccw(c5814.66,3938.8) v1@5823.2,3930.27
PD11: IS61LV25616.43 STM32F103ZET6.80 | length 1615.2
  Top Layer w10: v1@4760,3875 cw(c4747.93,3875) 4756.46,3866.46 cw(c4765,3857.93) v1@4765,3870 ; v1(4765,3875) 4735,3845 4735,3680 4781.69,3633.31 STM32F103ZET6.80@4832.32,3633.31 ; v1(5830.79,4084.21) IS61LV25616.43@5879.49,4084.21 ; v1@5834.32,4080.68 cw(c5842.86,4072.14) 5842.86,4084.21 cw(c5842.86,4096.28) v1@5834.32,4087.75 ; IS61LV25616.43@5857.07,4081.48 ccw(c5850.49,4074.9) 5850.49,4084.21 ccw(c5850.49,4093.53) IS61LV25616.43@5857.07,4086.94
  Bottom Layer w10: v1(4765,3875) 4860,3970 5410,3970 5525,4085 v1@5830,4085 ; v1@4765,3880 ccw(c4765,3892.07) 4773.54,3883.54 ccw(c4782.07,3875) v1@4770,3875 ; 5816.81,4085 cw(c5816.81,4070.24) v1@5827.25,4080.68 ; 5820.62,4085 ccw(c5820.62,4094.38) v1@5827.25,4087.75
PD12: IS61LV25616.44 STM32F103ZET6.81 | length 1545.6
  Top Layer w10: v1@4761.46,3821.46 cw(c4752.93,3812.93) 4765,3812.93 cw(c4777.07,3812.93) v1@4768.54,3821.46 ; v1(4765,3825) 4765,3685.63 4797.64,3652.99 STM32F103ZET6.81@4832.32,3652.99 ; v1(5740,4050) 5805.71,4115.71 IS61LV25616.44@5879.49,4115.71 ; v1@5740,4055 ccw(c5740,4067.07) 5748.54,4058.54 ccw(c5757.07,4050) v1@5745,4050 ; IS61LV25616.44@5857.07,4112.98 ccw(c5850.49,4106.39) 5850.49,4115.71 ccw(c5850.49,4125.02) IS61LV25616.44@5857.07,4118.44
  Bottom Layer w10: v1(4765,3825) 4885,3945 5260,3945 5425,3945 5530,4050 v1(5740,4050) ; v1@4765,3830 ccw(c4765,3842.07) 4773.54,3833.54 ccw(c4782.07,3825) v1@4770,3825 ; v1@5736.46,4046.46 ccw(c5727.93,4037.93) 5727.93,4050 ccw(c5727.93,4062.07) v1@5736.46,4053.54
PD13: IS61LV25616.28 STM32F103ZET6.82 | length 1258.1
  Top Layer w10: STM32F103ZET6.82@4832.32,3672.68 4882.32,3672.68 4930,3625 5115,3625 v1(5230,3740) ; v1@5225,3740 cw(c5212.93,3740) 5221.46,3731.46 cw(c5230,3722.93) v1@5230,3735 ; v1@5810,3620 cw(c5810,3607.93) 5818.54,3616.46 cw(c5827.07,3625) v1@5815,3625 ; v1(5810,3625) 5823.23,3611.77 IS61LV25616.28@5879.49,3611.77 ; IS61LV25616.28@5857.07,3609.04 ccw(c5850.49,3602.46) 5850.49,3611.77 ccw(c5850.49,3621.09) IS61LV25616.28@5857.07,3614.5
  Bottom Layer w10: v1@5230,3735 cw(c5230,3722.93) 5238.54,3731.46 cw(c5247.07,3740) v1@5235,3740 ; v1(5230,3740) 5275,3695 5740,3695 v1(5810,3625) ; v1@5805,3625 ccw(c5792.93,3625) 5801.46,3633.54 ccw(c5810,3642.07) v1@5810,3630
PD14: IS61LV25616.7 STM32F103ZET6.85 | length 738.3
  Top Layer w10: 4867.01,3731.73 STM32F103ZET6.85@4832.32,3731.73 4961.73,3731.73 4995,3765 5060,3765 5157,3862 5326.49,3862 5391.22,3926.73 IS61LV25616.7@5440.51,3926.73 ; IS61LV25616.7@5418.1,3924 ccw(c5411.51,3917.42) 5411.51,3926.73 ccw(c5411.51,3936.05) IS61LV25616.7@5418.1,3929.46
PD15: IS61LV25616.8 STM32F103ZET6.86 | length 839.2
  Top Layer w10: 4878.58,3751.42 STM32F103ZET6.86@4832.32,3751.42 4941.42,3751.42 4980,3790 5045,3790 5140,3885 v1(5265,3885) ; v1@5261.46,3881.46 ccw(c5252.93,3872.93) 5252.93,3885 ccw(c5252.93,3897.07) v1@5261.46,3888.54 ; v1(5395,3895) 5395.24,3895.24 IS61LV25616.8@5440.51,3895.24 ; v1@5398.54,3891.46 cw(c5407.64,3882.36) 5407.64,3895.24 ; v1@5398.54,3898.54 ccw(c5406.5,3906.5) 5406.5,3895.24 ; IS61LV25616.8@5418.1,3892.51 ccw(c5411.51,3885.92) 5411.51,3895.24 ccw(c5411.51,3904.55) IS61LV25616.8@5418.1,3897.96
  Bottom Layer w10: v1(5265,3885) 5385,3885 v1(5395,3895) ; v1@5268.54,3881.46 cw(c5277.07,3872.93) 5277.07,3885 cw(c5277.07,3897.07) v1@5268.54,3888.54 ; 5358.79,3885 ccw(c5358.79,3931.21) v1@5391.46,3898.54 ; 5382.93,3885 ccw(c5382.93,3907.07) v1@5398.54,3891.46
PE0: IS61LV25616.39 STM32F103ZET6.141 | length 2580.2
  Top Layer w10: STM32F103ZET6.141@4128.93,4283.55 ccw(c4123.09,4289.39) 4131.35,4289.39 ; STM32F103ZET6.141@4129.57,4257.32 4131.35,4259.1 4131.35,4293.79 ; STM32F103ZET6.141@4130.32,4283.42 cw(c4137.16,4287.98) 4131.35,4293.79 ; 4187.93,4342.93 ccw(c4170.86,4360) v1@4195,4360 ; v1(4200,4360) 4200,4355 4165,4320 4157.56,4320 4131.35,4293.79 ; v1(4200,4435) 4305,4540 5615,4540 5980,4175 5980,4020 5918.23,3958.23 IS61LV25616.39@5879.49,3958.23 ; v1@4200,4440 ccw(c4200,4452.07) 4208.54,4443.54 ccw(c4217.07,4435) v1@4205,4435 ; IS61LV25616.39@5901.9,3955.5 cw(c5908.49,3948.91) 5908.49,3958.23 cw(c5908.49,3967.54) IS61LV25616.39@5901.9,3960.96
  Bottom Layer w10: v1@4195,4360 v1(4200,4360) v1(4200,4435) ; v1@4196.46,4363.54 ccw(c4187.93,4372.07) 4200,4372.07 ccw(c4212.07,4372.07) v1@4203.54,4363.54 ; v1@4196.46,4431.46 cw(c4187.93,4422.93) 4200,4422.93 cw(c4212.07,4422.93) v1@4203.54,4431.46
PE1: IS61LV25616.40 STM32F103ZET6.142 | length 2369.4
  Top Layer w10: STM32F103ZET6.142@4109.88,4257.32 4109.88,4304.88 4315,4510 5575,4510 5605,4480 ; 5615,4480 5605,4480 ; IS61LV25616.40@5879.49,3989.72 5914.72,3989.72 5955,4030 5955,4160 5635,4480 5605,4480 ; IS61LV25616.40@5901.9,3987 cw(c5908.49,3980.41) 5908.49,3989.72 cw(c5908.49,3999.04) IS61LV25616.40@5901.9,3992.45
PE7: IS61LV25616.13 STM32F103ZET6.58 | length 1933.6
  Top Layer w10: STM32F103ZET6.58@4483.9,3422.68 4483.9,3181.1 4525,3140 5320,3140 5560,3380 5560,3650 5472.24,3737.76 IS61LV25616.13@5440.51,3737.76 ; IS61LV25616.13@5460.2,3733.9 cw(c5460.2,3695.5) 5487.35,3722.65 ; IS61LV25616.13@5460.2,3743.9 cw(c5460.2,3729.64) 5470.28,3739.72 ; IS61LV25616.13@5461.95,3734.32 cw(c5468.33,3721.79) 5478.27,3731.73 ; IS61LV25616.13@5462.93,3735.03 cw(c5469.51,3728.44) 5469.51,3737.76 cw(c5469.51,3747.07) IS61LV25616.13@5462.93,3740.48
PE8: IS61LV25616.14 STM32F103ZET6.59 | length 1848.6
  Top Layer w10: STM32F103ZET6.59@4503.58,3422.68 4503.58,3191.42 4535,3160 5310,3160 5540,3390 5540,3640 5473.74,3706.26 IS61LV25616.14@5440.51,3706.26 ; IS61LV25616.14@5457.59,3711.82 cw(c5462.41,3701.54) 5470.43,3709.57 ; IS61LV25616.14@5460.2,3702.4 cw(c5460.2,3660.39) 5489.9,3690.1 ; IS61LV25616.14@5460.2,3712.4 cw(c5460.2,3694.53) 5472.83,3707.17 ; IS61LV25616.14@5461.83,3702.77 cw(c5468.84,3687.81) 5480.51,3699.49 ; IS61LV25616.14@5462.93,3703.53 cw(c5469.51,3696.95) 5469.51,3706.26 cw(c5469.51,3715.57) IS61LV25616.14@5462.93,3708.99
PE9: IS61LV25616.15 STM32F103ZET6.60 | length 1660.5
  Top Layer w10: STM32F103ZET6.60@4523.27,3422.68 4523.27,3201.73 4545,3180 5300,3180 5520,3400 5520,3630 5475.24,3674.76 IS61LV25616.15@5440.51,3674.76 ; IS61LV25616.15@5462.93,3672.04 cw(c5469.51,3665.45) 5469.51,3674.76 cw(c5469.51,3684.08) IS61LV25616.15@5462.93,3677.49
PE10: IS61LV25616.16 STM32F103ZET6.63 | length 1398.7
  Top Layer w10: STM32F103ZET6.63@4582.32,3422.68 4582.32,3387.68 4755,3215 5305,3215 5500,3410 5500,3620 5476.73,3643.27 IS61LV25616.16@5440.51,3643.27 ; IS61LV25616.16@5462.93,3640.54 cw(c5469.51,3633.95) 5469.51,3643.27 cw(c5469.51,3652.58) IS61LV25616.16@5462.93,3646
PE11: IS61LV25616.29 STM32F103ZET6.64 | length 1629.2
  Top Layer w10: STM32F103ZET6.64@4602.01,3422.68 4602.01,3532.01 4625,3555 v1(4710,3555) ; v1@4706.46,3551.46 ccw(c4697.93,3542.93) 4697.93,3555 ccw(c4697.93,3567.07) v1@4706.46,3558.54 ; IS61LV25616.29@5879.49,3643.27 v1(5928.27,3643.27) ; IS61LV25616.29@5901.9,3640.54 cw(c5908.49,3633.95) 5908.49,3643.27 cw(c5908.49,3652.58) IS61LV25616.29@5901.9,3646 ; v1@5924.73,3639.73 ccw(c5916.2,3631.2) 5916.2,3643.27 ccw(c5916.2,3655.34) v1@5924.73,3646.8
  Bottom Layer w10: v1(4710,3555) 5860,3555 5930,3625 5930,3641.54 v1(5928.27,3643.27) ; v1@4713.54,3551.46 cw(c4722.07,3542.93) 4722.07,3555 cw(c4722.07,3567.07) v1@4713.54,3558.54 ; v1@5924.73,3639.73 cw(c5912.02,3627.02) 5930,3627.02
PE12: IS61LV25616.30 STM32F103ZET6.65 | length 1679.5
  Top Layer w10: STM32F103ZET6.65@4621.69,3422.68 4621.69,3511.69 4640,3530 v1(4670,3530) ; v1@4666.46,3526.46 ccw(c4657.93,3517.93) 4657.93,3530 ccw(c4657.93,3542.07) v1@4666.46,3533.54 ; IS61LV25616.30@5879.49,3674.76 5934.76,3674.76 v1(5935,3675) ; IS61LV25616.30@5901.9,3672.04 cw(c5908.49,3665.45) 5908.49,3674.76 cw(c5908.49,3684.08) IS61LV25616.30@5901.9,3677.49 ; 5922.36,3674.76 ccw(c5922.36,3687.64) v1@5931.46,3678.54 ; 5923.5,3674.76 cw(c5923.5,3663.5) v1@5931.46,3671.46
  Bottom Layer w10: v1(4670,3530) 5870,3530 5955,3615 5955,3655 v1(5935,3675) ; v1@4673.54,3526.46 cw(c4682.07,3517.93) 4682.07,3530 cw(c4682.07,3542.07) v1@4673.54,3533.54 ; v1@5935,3670 cw(c5935,3657.93) 5943.54,3666.46 cw(c5952.07,3675) v1@5940,3675
PE13: IS61LV25616.31 STM32F103ZET6.66 | length 1776.6
  Top Layer w10: STM32F103ZET6.66@4641.38,3422.68 4641.38,3491.38 v1(4650,3500) ; 4641.38,3467.11 cw(c4682.89,3467.11) v1@4653.54,3496.46 ; 4641.38,3491.26 cw(c4658.74,3491.26) v1@4646.46,3503.54 ; IS61LV25616.31@5879.49,3706.26 v1(5943.74,3706.26) ; IS61LV25616.31@5901.9,3703.53 cw(c5908.49,3696.95) 5908.49,3706.26 cw(c5908.49,3715.57) IS61LV25616.31@5901.9,3708.99 ; v1@5940.2,3702.72 ccw(c5931.67,3694.19) 5931.67,3706.26 ccw(c5931.67,3718.33) v1@5940.2,3709.8
  Bottom Layer w10: v1@4646.46,3503.54 cw(c4657.24,3492.76) 4657.24,3508 ; v1(4650,3500) 4658,3508 5883,3508 5980,3605 5980,3670 v1(5943.74,3706.26) ; v1@4653.54,3496.46 cw(c4681.38,3468.62) 4681.38,3508 ; v1@5943.74,3701.26 cw(c5943.74,3689.19) 5952.28,3697.72 cw(c5960.81,3706.26) v1@5948.74,3706.26
PE14: IS61LV25616.32 STM32F103ZET6.67 | length 1806.3
  Top Layer w10: STM32F103ZET6.67@4661.06,3422.68 4661.06,3471.06 v1(4670,3480) ; STM32F103ZET6.67@4661.06,3446.36 cw(c4703.64,3446.36) v1@4673.54,3476.46 ; 4661.06,3470.5 cw(c4679.5,3470.5) v1@4666.46,3483.54 ; IS61LV25616.32@5879.49,3737.76 5962.24,3737.76 v1(5985,3715) ; IS61LV25616.32@5901.9,3735.03 cw(c5908.49,3728.44) 5908.49,3737.76 cw(c5908.49,3747.07) IS61LV25616.32@5901.9,3740.48 ; v1@5980,3715 ccw(c5967.93,3715) 5976.46,3723.54 ccw(c5985,3732.07) v1@5985,3720
  Bottom Layer w10: v1(4670,3480) 5890,3480 6005,3595 6005,3695 v1(5985,3715) ; v1@4673.54,3476.46 cw(c4682.07,3467.93) 4682.07,3480 cw(c4682.07,3492.07) v1@4673.54,3483.54 ; v1@5985,3710 cw(c5985,3697.93) 5993.54,3706.46 cw(c6002.07,3715) v1@5990,3715
PE15: IS61LV25616.35 STM32F103ZET6.68 | length 2002.2
  Top Layer w10: STM32F103ZET6.68@4680.75,3422.68 4680.75,3457.36 4693.38,3470 5110,3470 5135,3445 v1(5215,3445) ; v1@5211.46,3441.46 ccw(c5202.93,3432.93) 5202.93,3445 ccw(c5202.93,3457.07) v1@5211.46,3448.54 ; IS61LV25616.35@5879.49,3832.24 v1(5927.24,3832.24) ; IS61LV25616.35@5901.9,3829.52 cw(c5908.49,3822.93) 5908.49,3832.24 cw(c5908.49,3841.56) IS61LV25616.35@5901.9,3834.97 ; v1@5923.71,3828.71 ccw(c5915.17,3820.17) 5915.17,3832.24 ccw(c5915.17,3844.32) v1@5923.71,3835.78
  Bottom Layer w10: v1(5215,3445) 5900,3445 6035,3580 6035,3735 5950,3820 ; v1@5218.54,3441.46 cw(c5227.07,3432.93) 5227.07,3445 cw(c5227.07,3457.07) v1@5218.54,3448.54 ; v1(5927.24,3832.24) 5937.76,3832.24 ; v1@5929.29,3827.68 cw(c5935.14,3814.63) 5945.26,3824.74 ; v1@5930.1,3828.14 cw(c5935.87,3819.84) 5943.01,3826.99 ; v1@5931.12,3829.09 cw(c5937.76,3823.69) 5937.76,3832.24 ; v1@5931.12,3835.4 ccw(c5937.76,3840.79) 5937.76,3832.24 ; 5940,3830 5950,3820 ; 5937.76,3832.24 5950,3820 ; v1@5927.24,3827.24 cw(c5927.24,3789.79) 5953.72,3816.28 ccw(c5927.24,3789.79) v1@5927.24,3827.24
PF0: IS61LV25616.1 STM32F103ZET6.10 | length 1578.2
  Top Layer w10: STM32F103ZET6.10@3997.68,4007.32 4042.32,4007.32 v1(4070,4035) ; v1@4065,4035 cw(c4052.93,4035) 4061.46,4026.46 cw(c4070,4017.93) v1@4070,4030 ; v1(5370,4115) 5370.71,4115.71 IS61LV25616.1@5440.51,4115.71 ; v1@5373.54,4111.46 cw(c5383.78,4101.22) 5383.78,4115.71 ; v1@5373.54,4118.54 ccw(c5380.36,4125.36) 5380.36,4115.71 ; IS61LV25616.1@5418.1,4112.98 ccw(c5411.51,4106.39) 5411.51,4115.71 ccw(c5411.51,4125.02) IS61LV25616.1@5418.1,4118.44
  Bottom Layer w10: v1(4070,4035) 4150,4115 v1(5370,4115) ; v1@4070,4040 ccw(c4070,4052.07) 4078.54,4043.54 ccw(c4087.07,4035) v1@4075,4035 ; v1@5366.46,4111.46 ccw(c5357.93,4102.93) 5357.93,4115 ccw(c5357.93,4127.07) v1@5366.46,4118.54
PF1: IS61LV25616.2 STM32F103ZET6.11 | length 1573.3
  Top Layer w10: STM32F103ZET6.11@3997.68,3987.64 4057.64,3987.64 v1(4070,4000) ; v1@4065,4000 cw(c4052.93,4000) 4061.46,3991.46 cw(c4070,3982.93) v1@4070,3995 ; v1(5370.79,4084.21) IS61LV25616.2@5440.51,4084.21 ; v1@5374.32,4080.68 cw(c5382.86,4072.14) 5382.86,4084.21 cw(c5382.86,4096.28) v1@5374.32,4087.75 ; IS61LV25616.2@5418.1,4081.48 ccw(c5411.51,4074.9) 5411.51,4084.21 ccw(c5411.51,4093.53) IS61LV25616.2@5418.1,4086.94
  Bottom Layer w10: v1(4070,4000) 4154.21,4084.21 v1(5370.79,4084.21) ; v1@4070,4005 ccw(c4070,4017.07) 4078.54,4008.54 ccw(c4087.07,4000) v1@4075,4000 ; v1@5367.25,4080.68 ccw(c5358.72,4072.14) 5358.72,4084.21 ccw(c5358.72,4096.28) v1@5367.25,4087.75
PF2: IS61LV25616.3 STM32F103ZET6.12 | length 1569.1
  Top Layer w10: STM32F103ZET6.12@3997.68,3967.95 v1(4072.95,3967.95) ; v1@4069.42,3964.42 ccw(c4060.88,3955.88) 4060.88,3967.95 ccw(c4060.88,3980.02) v1@4069.42,3971.49 ; v1(5370,4055) 5438.23,4055 IS61LV25616.3@5440.51,4052.72 ; v1@5373.54,4051.46 cw(c5382.07,4042.93) 5382.07,4055 cw(c5382.07,4067.07) v1@5373.54,4058.54 ; 5406,4055 cw(c5406,4037.89) IS61LV25616.3@5418.1,4049.99
  Bottom Layer w10: v1(4072.95,3967.95) 4160,4055 v1(5370,4055) ; v1@4072.95,3972.95 ccw(c4072.95,3985.02) 4081.49,3976.49 ccw(c4090.02,3967.95) v1@4077.95,3967.95 ; v1@5366.46,4051.46 ccw(c5357.93,4042.93) 5357.93,4055 ccw(c5357.93,4067.07) v1@5366.46,4058.54
PF3: IS61LV25616.4 STM32F103ZET6.13 | length 1665.7
  Top Layer w10: STM32F103ZET6.13@3997.68,3948.27 4056.73,3948.27 v1(4070,3935) ; v1@4065,3935 ccw(c4052.93,3935) 4061.46,3943.54 ccw(c4070,3952.07) v1@4070,3940 ; v1(5300,4030) 5330,4030 5338.78,4021.22 IS61LV25616.4@5440.51,4021.22 5371.22,4021.22 ; v1@5303.54,4026.46 cw(c5312.07,4017.93) 5312.07,4030 cw(c5312.07,4042.07) v1@5303.54,4033.54 ; 5411.51,4021.22 ccw(c5411.51,4030.53) 5418.1,4023.95 cw(c5411.51,4030.53) 5411.51,4021.22 ; 5411.51,4021.22 cw(c5411.51,4011.91) 5418.1,4018.49 ccw(c5411.51,4011.91) 5411.51,4021.22
  Bottom Layer w10: v1(4070,3935) 4090,3935 4185,4030 v1(5300,4030) ; v1@4073.54,3931.46 cw(c4082.07,3922.93) 4082.07,3935 cw(c4082.07,3947.07) v1@4073.54,3938.54 ; v1@5296.46,4026.46 ccw(c5287.93,4017.93) 5287.93,4030 ccw(c5287.93,4042.07) v1@5296.46,4033.54